# EAGLE board gs305e-mounting (EAGLE 7.7.0)
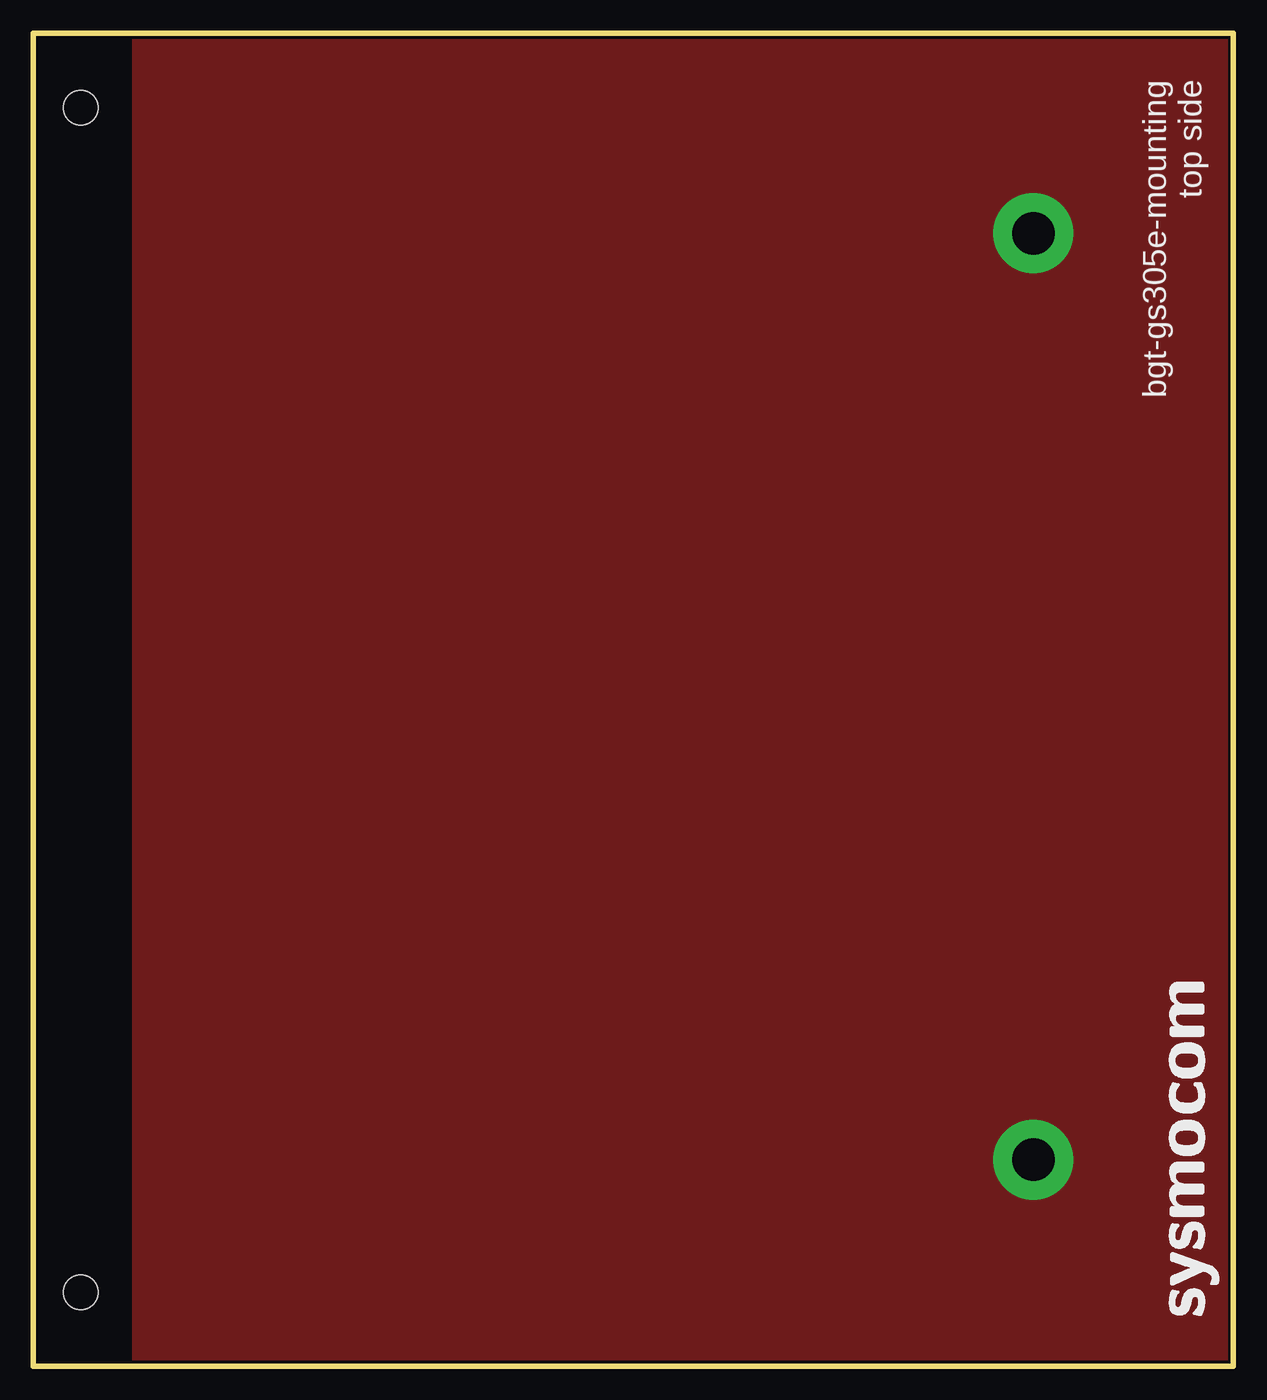
[diagram p0: board, top side]
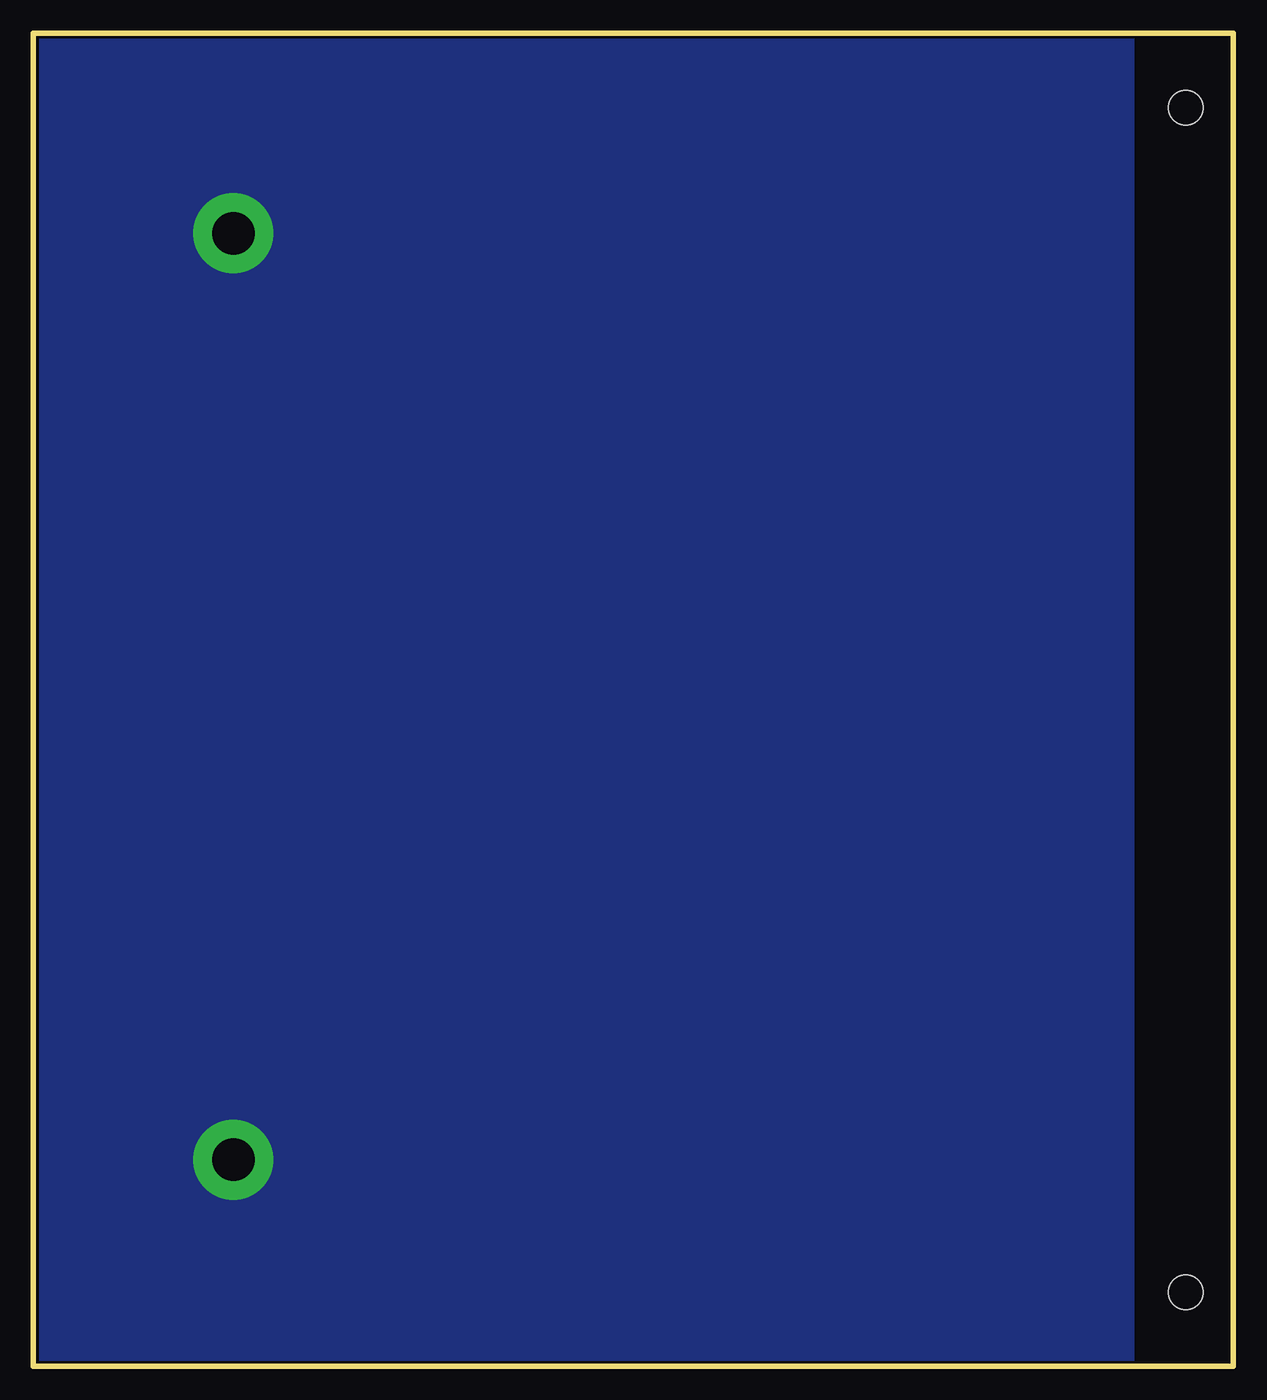
[diagram p1: board, bottom side, seen from below]

Size 90 x 100 mm. Coordinates in mm from the lower left corner, seen from the top.
Outline: 0,0 0,100 90,100 90,0 0,0
Copper layers (1*16): Top 0.035mm / dielectric 1.6mm / Bottom 0.035mm
Design rules "jlcpcb-2layers": minimum track width 5mil, minimum drill 0.3mm, track to track 5mil, track to pad 5mil, pad to pad 5mil, via to via 5mil, smd to smd 5mil, copper to edge 0.2mm, drill to drill 6mil, minimum pad ring 10mil, minimum via ring 3mil, stop-mask expansion 4mil, vias tented up to drill 0mil, thermal gap 10mil
Holes 2.6 mm at 3.56,94.4 3.56,5.53

## Placement (x,y rotation side)
E$1  [SYSMOCOM-25]  88.9,3.81 90 top

## Library data of the parts
E$1 = sysmocom-logo

## Tracks (layer width: path | path; a pad name or v marks a point on that pad's centre or on a via)
GND  (via drill 3.2 pad 6)
  other vias: 75,85 75,15.5
  pour Top: 7.62,0 7.62,100.33 90.17,100.33 90.17,0
  pour Bottom: 7.62,0 7.62,100.33 90.17,100.33 90.17,0

## Text on the board
tNames: bgt-gs305e-mounting / top side